# Altium PCB Asfaloth_L2_AVI_ver0.0.PcbDoc (part 2 of 2)
Units mil, origin at the board's own origin, x right, y up, seen from the top; angles counter-clockwise.
Board outline 4135 x 3937.01 mil, 2 copper layers (Top Layer, Bottom Layer); 80 components, 219 nets, 489 pads, 1059 vias.
Unrouted connection lines stored in the file: 5.
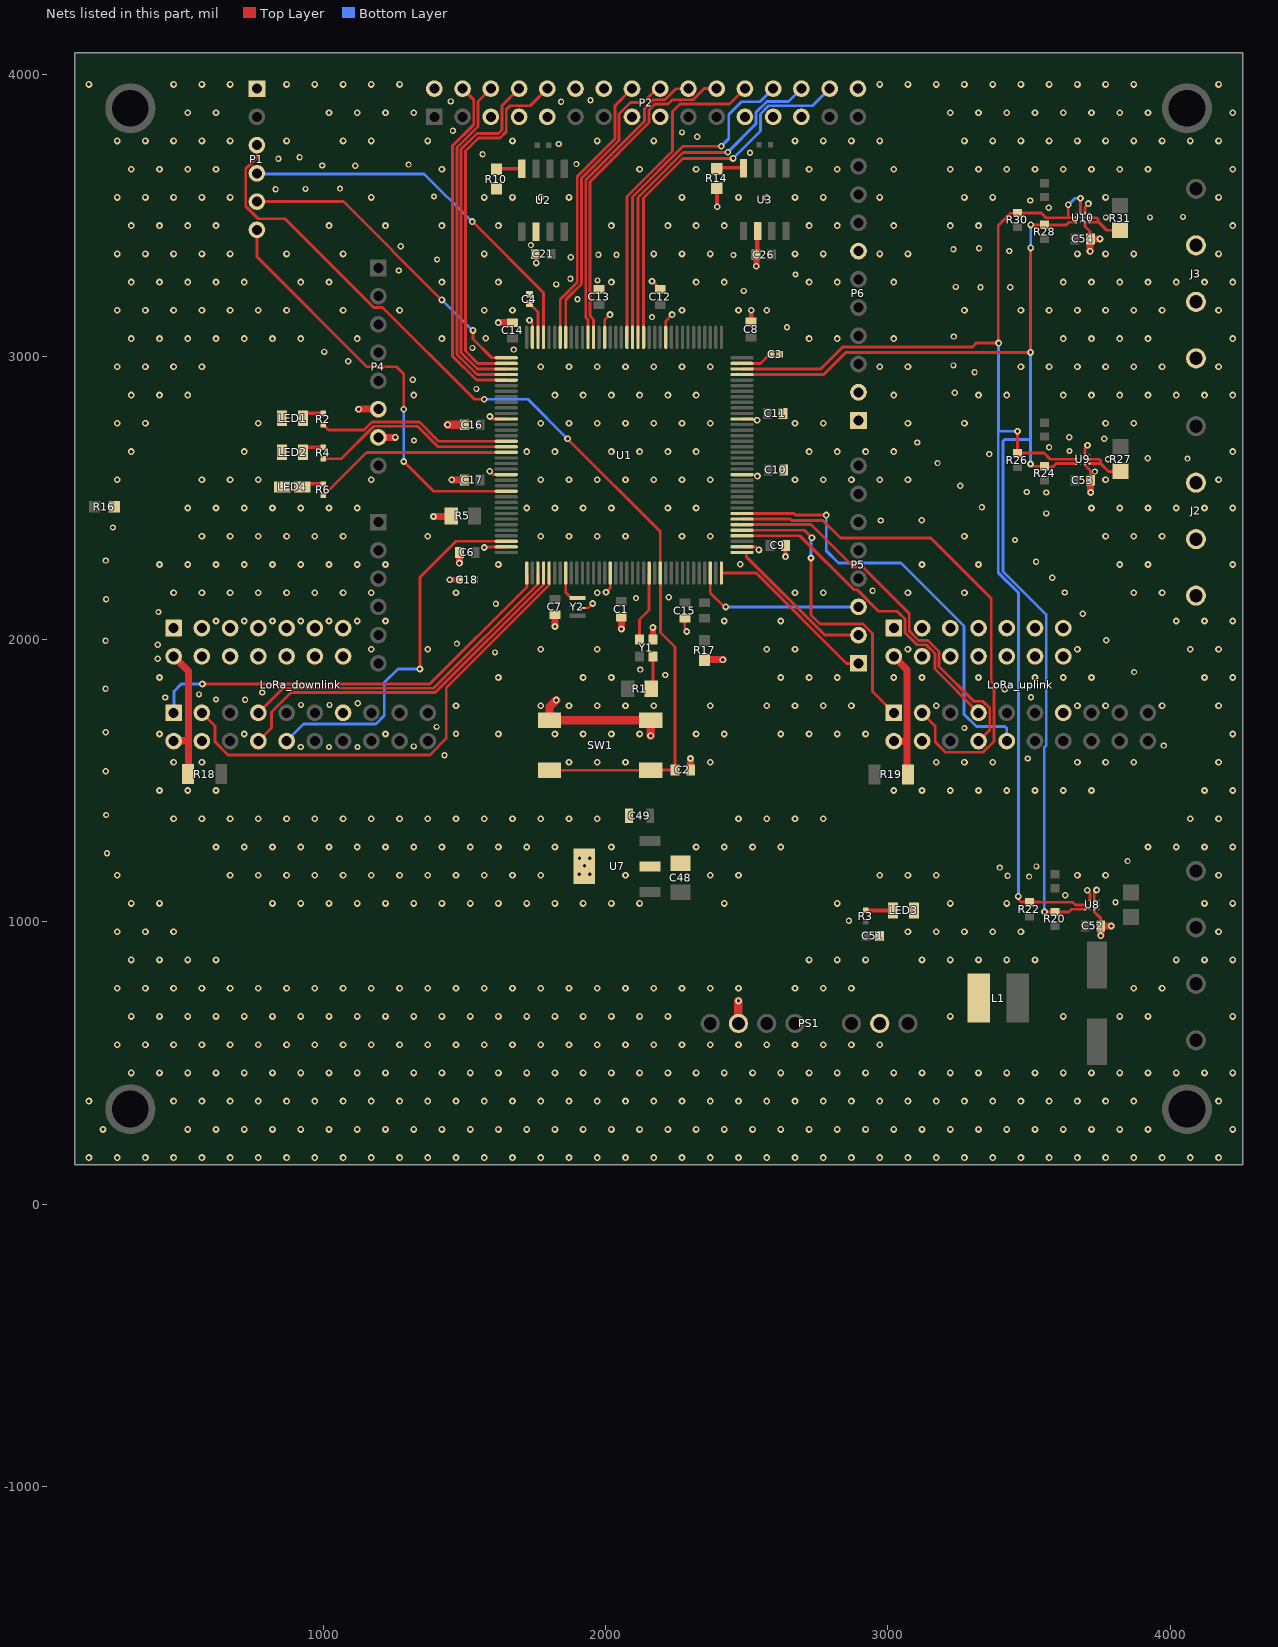
[diagram p2: the nets of this part, all layers, seen from the top]

## Via types
v1: diameter 24, hole 12, Top Layer to Bottom Layer, tented both sides, 893 vias
v2: diameter 22, hole 12, Top Layer to Bottom Layer, tented both sides, 166 vias

## Nets (pads, with @x,y where several pads share a name; then routed paths per layer and width w, separated by ;. In a path a pad name is that pad's centre, name@x,y a point inside that pad or via, vN(x,y) a via of type N, cw(c..) or ccw(c..) an arc to the next point about the centre after c; other vN are vias at no path point) (continued)
GND: C1.2 C2.2 C3.2 C4.2 C6.2 C7.2 C8.2 C9.2 C10.2 C11.2 C12.2 C13.2 C14.2 C15.2 C16.2 C17.2 C18.2 C21.2 C26.2 C48.1 C49.2 C52.2 C53.2 C54.2 LED1.1 LED2.1 LED3.1 LED4.1 LoRa_downlink.4 LoRa_downlink.24 LoRa_downlink.32 LoRa_uplink.4 LoRa_uplink.24 LoRa_uplink.32 P1.1 P2.2 P2.5 P2.7 P2.9 P2.12 P2.14 P2.15 P2.17 P2.23 P2.25 P2.27 P2.32 P4.6 P4.7 P6.1 P6.2 P6.7 PS1.7 R5.2 R10.1 R14.1 R16.2 R17.1 SW1.3 SW1.4 U1.16 U1.38 U1.51 U1.61 U1.83 U1.94 U1.107 U1.120 U1.130 U1.143 U2.2 U3.2 U7.2 U7.4 U8.B3 U8.C1 U8.C3 U9.C1 U9.C3 U10.C1 U10.C3 Y1.2 Y2.2 | length 2936
  Top Layer w8: Y2.2@1918.75,2111.03 1939.03,2111.03 v1(1955,2127)
  Top Layer w10: v1(1570.91,2325.2) 1573.23,2327.52 U1.143@1648.83,2327.52 ; v1(1590,2595) 1601.57,2583.43 U1.130@1648.83,2583.43 ; v1(1591,2789) 1592,2789 1600.72,2780.28 U1.120@1648.83,2780.28 ; v1(1731,3130) 1741.01,3119.99 1741.01,3069.99 U1.107@1741.35,3069.65 ; C13.2@1977.46,3240 C13.2@1977.57,3240.12 ; U1.94@1997.26,3069.65 1997.26,3131.26 v1(2016,3150) ; v1(2002,2167) 2016.94,2181.94 U1.16@2016.94,2235 ; v1(2165,3268) 2165.99,3268 2193.99,3240 C12.2@2194.11,3240.12 ; U1.83@2213.8,3069.65 2213.8,3127.8 v1(2236,3150) ; C15.2@2281,2074.44 2281,2038.64 2288,2031.64 v1(2288,2027.86) ; R17.1@2351.26,1926.74 R17.1@2352.52,1928 ; U1.38@2483.48,2327.52 2532.48,2327.52 v1(2543.32,2316.68) 2543.32,2316.47 2545.79,2314 v1@2546,2314 ; U1.51@2483.48,2583.43 2483.83,2583.08 2532.92,2583.08 v1(2538,2578) ; U1.61@2483.48,2780.28 2483.83,2779.93 2533.07,2779.93 v1(2537,2776) ; U9.C1@3697.75,2622.25 3697.75,2616.79 3707.34,2607.2 3707.84,2607.2 3717.43,2597.61 C53.2@3717.43,2565.85 ; U9.C3@3697.75,2653.75 3697.75,2677.75 v1(3707,2687) ; U10.C1@3697.75,3477.25 3697.75,3462.5 3716,3444.25 3716,3419.75 C54.2@3717.43,3418.32 ; U10.C3@3697.75,3508.75 3697.75,3530.14 3710,3542.39 v1(3710,3543) ; v1(3706,1111.39) 3715.25,1102.14 U8.B3@3715.25,1075.75 ; U8.C1@3731,1044.25 3731,1035 3753.56,1012.44 C52.2@3753.56,985.32 ; U8.C3@3731,1075.75 3731,1104.5 v1(3738.95,1112.45)
  Top Layer w15: C21.2@1751.72,3364.72 C21.2@1751.44,3365 C21.2@1752.72,3366.28 ; U2.2@1752.72,3442.5 U2.2@1754,3443.78 ; C7.2@1821,2087.44 C7.2@1821.5,2086.94 ; C1.2@2056,2078.88 C1.2@2056.19,2078.7 ; v1@2056.19,2036.81 v1(2056.37,2036.63) ; C12.2@2194.11,3240.12 C12.2@2194.11,3240.12 ; R14.1@2394,3597.48 2395,3596.48 2395,3533 v1(2396,3532) ; C8.2@2516,3125.12 v1(2516,3165) ; C26.2@2533.44,3362 C26.2@2534.72,3360.72 ; C26.2@2537.72,3362 U3.2@2537.72,3445.78 ; v1(2543.32,2316.68) v1@2546,2314 ; v1(2637.44,2293) C9.2@2637.44,2332.88 ; LED3.1@3098.4,1040 LED3.1@3098.5,1039.9
  Top Layer w16: R17.1@2351,1926.48 R17.1@2351.26,1926.74
  Top Layer w20: v1(1449,2211) C18.2@1483.42,2210.99 ; R10.1@1614,3595.48 R10.1@1615,3594.48 ; v1(2168,2042) 2168,2039 2168.24,2038.76 Y1.2@2168.24,1999.06 ; v1(2534,3321) 2534.72,3321.72 C26.2@2534.72,3360.72 ; C52.2@3753.56,985.32 C52.2@3754,984.87
  Top Layer w25: v1(1126,2815) P4.6@1196,2815 ; P4.7@1196,2715 v1(1256,2715) ; v1(1391,2435) 1451.63,2435 R5.2@1453.63,2437 ; v1(1456,2565) C17.2@1500.88,2565 ; v1(1483,2270) 1483.44,2270.44 C6.2@1483.44,2307.83 C6.2@1483.87,2307.19 ; v1(1620.56,3121.56) C14.2@1671,3121.56 ; v1(1821.5,2045.5) C7.2@1821.5,2086.94 ; v1@2056.19,2036.81 C1.2@2056.19,2078.7 ; v1(2301,1578) 2301,1535.06 C2.2@2301.56,1534.5 ; C2.2@2301.56,1538 C2.2@2301.56,1534.5 ; R17.1@2352.52,1928 v1(2416,1928) ; LoRa_uplink.24@3121,1930 3126,1935 LoRa_uplink.24@3121,1940 ; v1(3716,3374) 3716,3416.57 3717.43,3418 v1(3751,3418) ; C53.2@3717.43,2563.32 3718,2562.75 v1(3718,2520) ; C52.2@3753.56,985.32 3756.14,985.32 3756.41,985.04 v1(3791,985) v1(3791,985) ; v1(3754,951) C52.2@3754,984.87 ; C2.2@2301.56,1534.5 2302,1534.06 2301.56,1534.06 C2.2@2301.56,1534.5
  Top Layer w30: v1(1441,2760) C16.2@1500.88,2760 ; v1(1826,1785) 1801.87,1760.87 SW1.4@1801.87,1713.19 SW1.3@2160.13,1713.19 2160.13,1659.13 v1(2160,1659) ; C48.1@2254.7,1196.06 C48.1@2266,1207.36 ; v1(2471,720) PS1.7@2471,640 PS1.7@2472.93,641.93
  other v1: 171,165 271,165 371,165 471,165 571,165 671,165 771,165 871,165 971,165 1071,165 1171,165 1271,165 1371,165 1471,165 1571,165 1671,165 1771,165 1871,165 1971,165 2071,165 2171,165 2271,165 2371,165 2471,165 2571,165 2671,165 2771,165 2871,165 2971,165 3071,165 3171,165 3271,165 3371,165 3471,165 3571,165 3671,165 3771,165 3871,165 3971,165 4071,165 4171,165 221,265 521,265 621,265 721,265 821,265 921,265 1021,265 1121,265 1221,265 1321,265 1421,265 1521,265 1621,265 1721,265 1821,265 1921,265 2021,265 2121,265 2221,265 2321,265 2421,265 2521,265 2621,265 2721,265 2821,265 2921,265 3021,265 3121,265 3221,265 3321,265 3421,265 3521,265 3621,265 3721,265 3821,265 3921,265 4221,265 171,365 471,365 571,365 671,365 771,365 871,365 971,365 1071,365 1171,365 1271,365 1371,365 1471,365 1571,365 1671,365 1771,365 1871,365 1971,365 2071,365 2171,365 2271,365 2371,365 2471,365 2571,365 2671,365 2771,365 2871,365 2971,365 3071,365 3171,365 3271,365 3371,365 3471,365 3571,365 3671,365 3771,365 3871,365 4171,365 321,465 421,465 521,465 621,465 721,465 821,465 921,465 1021,465 1121,465 1221,465 1321,465 1421,465 1521,465 1621,465 1721,465 1821,465 1921,465 2021,465 2121,465 2221,465 2321,465 2421,465 2521,465 2621,465 2721,465 2821,465 2921,465 3021,465 3121,465 3221,465 3321,465 3421,465 3521,465 3621,465 3721,465 3821,465 3921,465 4021,465 4121,465 4221,465 271,565 371,565 471,565 571,565 671,565 771,565 871,565 971,565 1071,565 1171,565 1271,565 1371,565 1471,565 1571,565 1671,565 1771,565 1871,565 1971,565 2071,565 2171,565 2271,565 2371,565 2471,565 2571,565 2671,565 2771,565 2871,565 2971,565 321,665 421,665 521,665 621,665 721,665 821,665 921,665 1021,665 1121,665 1221,665 1321,665 1421,665 1521,665 1621,665 1721,665 1821,665 1921,665 2021,665 2121,665 2221,665 3221,665 3621,665 3821,665 3921,665 4221,665 271,765 371,765 471,765 571,765 671,765 771,765 871,765 971,765 1071,765 1171,765 1271,765 1371,765 1471,765 1571,765 1671,765 1771,765 1871,765 1971,765 2071,765 2171,765 2271,765 2371,765 2471,765 2671,765 2771,765 2871,765 3871,765 3971,765 321,865 421,865 521,865 621,865 2721,865 2821,865 2921,865 3121,865 3221,865 3321,865 3421,865 3521,865 4021,865 4121,865 4221,865 271,965 371,965 471,965 3071,965 3171,965 3271,965 3371,965 3471,965 4171,965 321,1065 421,1065 821,1065 921,1065 1021,1065 1121,1065 1221,1065 1321,1065 1421,1065 1521,1065 1621,1065 1721,1065 1821,1065 1921,1065 2021,1065 2121,1065 2421,1065 2821,1065 3221,1065 3421,1065 4121,1065 4221,1065 271,1165 671,1165 771,1165 871,1165 971,1165 1071,1165 1171,1165 1271,1165 1371,1165 1471,1165 1571,1165 1671,1165 1771,1165 2071,1165 2371,1165 2471,1165 2971,1165 3071,1165 3171,1165 3671,1165 3771,1165 4171,1165 621,1265 721,1265 821,1265 921,1265 1021,1265 1121,1265 1221,1265 1321,1265 1421,1265 1521,1265 1621,1265 1721,1265 1821,1265 2021,1265 2321,1265 2421,1265 2521,1265 2621,1265 3921,1265 4021,1265 4121,1265 4221,1265 471,1365 571,1365 671,1365 771,1365 871,1365 971,1365 1071,1365 1171,1365 1271,1365 1371,1365 1471,1365 1571,1365 1671,1365 1771,1365 1871,1365 1971,1365 2471,1365 2571,1365 2671,1365 2771,1365 4071,1365 4171,1365 421,1465 521,1465 621,1465 3021,1465 3121,1465 3221,1465 3321,1465 3421,1465 3521,1465 3621,1465 3721,1465 4121,1465 4221,1465 471,1565 571,1565 1871,1565 1971,1565 2071,1565 2371,1565 3171,1565 3271,1565 3371,1565 3671,1565 3771,1565 3871,1565 4171,1565 421,1665 721,1665 1221,1665 1621,1665 1821,1665 1921,1665 2021,1665 2121,1665 2321,1665 2421,1665 2621,1665 2721,1665 2821,1665 2921,1665 4221,1665 1471,1765 1771,1765 1871,1765 1971,1765 2071,1765 2171,1765 2371,1765 2571,1765 2671,1765 2771,1765 2871,1765 3171,1765 3671,1765 3771,1765 3971,1765 4171,1765 421,1865 1621,1865 1921,1865 2021,1865 2621,1865 2721,1865 2821,1865 3021,1865 3121,1865 3321,1865 3521,1865 3621,1865 3721,1865 4121,1865 4221,1865 1171,1965 1371,1965 1771,1965 1971,1965 2571,1965 2671,1965 3071,1965 3671,1965 4071,1965 4171,1965 621,2065 721,2065 821,2065 921,2065 1021,2065 1121,2065 1221,2065 2421,2065 2621,2065 4021,2065 4121,2065 4221,2065 471,2165 571,2165 671,2165 771,2165 871,2165 971,2165 1071,2165 1171,2165 1471,2165 1971,2165 2671,2165 2771,2165 3071,2165 3271,2165 3871,2165 3971,2165 421,2265 521,2265 621,2265 721,2265 821,2265 921,2265 1021,2265 1121,2265 1221,2265 1621,2265 3121,2265 3321,2265 3821,2265 3921,2265 4221,2265 571,2365 671,2365 771,2365 871,2365 971,2365 1071,2365 1371,2365 1771,2365 1871,2365 1971,2365 2071,2365 2271,2365 2371,2365 3271,2365 3771,2365 3871,2365 3971,2365 521,2465 621,2465 721,2465 821,2465 921,2465 1021,2465 1121,2465 1721,2465 1821,2465 1921,2465 2021,2465 2221,2465 2321,2465 3721,2465 3821,2465 3921,2465 4021,2465 4121,2465 4221,2465 271,2565 571,2565 671,2565 771,2565 1171,2565 1771,2565 1871,2565 1971,2565 2071,2565 2171,2565 2271,2565 2371,2565 2671,2565 2771,2565 2871,2565 2971,2565 3071,2565 3771,2565 4171,2565 321,2665 721,2665 1721,2665 1821,2665 2021,2665 2121,2665 2221,2665 2321,2665 2721,2665 2821,2665 2921,2665 3021,2665 4221,2665 271,2765 371,2765 771,2765 1771,2765 1871,2765 1971,2765 2071,2765 2171,2765 2271,2765 2371,2765 2671,2765 2771,2765 3071,2765 3271,2765 3771,2765 3871,2765 321,2865 421,2865 521,2865 1321,2865 1821,2865 1921,2865 2021,2865 2121,2865 2221,2865 2321,2865 3021,2865 3321,2865 3421,2865 3621,2865 3721,2865 3821,2865 3921,2865 4021,2865 4121,2865 4221,2865 271,2965 371,2965 471,2965 571,2965 1771,2965 1871,2965 1971,2965 2071,2965 2171,2965 2271,2965 2371,2965 2971,2965 3071,2965 3471,2965 3571,2965 3671,2965 3771,2965 3871,2965 3971,2965 4171,2965 321,3065 421,3065 521,3065 621,3065 721,3065 821,3065 921,3065 1121,3065 1421,3065 2721,3065 2821,3065 3021,3065 3621,3065 3721,3065 3821,3065 3921,3065 4221,3065 271,3165 371,3165 471,3165 571,3165 671,3165 771,3165 871,3165 1071,3165 1271,3165 1571,3165 1671,3165 2271,3165 2471,3165 2571,3165 3271,3165 3471,3165 3571,3165 3671,3165 3771,3165 3871,3165 3971,3165 4171,3165 321,3265 421,3265 521,3265 621,3265 721,3265 921,3265 1021,3265 1421,3265 1621,3265 2021,3265 2321,3265 2421,3265 2721,3265 2821,3265 3021,3265 3621,3265 3721,3265 3821,3265 3921,3265 4021,3265 4121,3265 4221,3265 1755,3333 271,3365 371,3365 471,3365 571,3365 671,3365 871,3365 1071,3365 1571,3365 2171,3365 2271,3365 2371,3365 2671,3365 2771,3365 2971,3365 3071,3365 3671,3365 3771,3365 3871,3365 4171,3365 321,3465 421,3465 521,3465 621,3465 1021,3465 1221,3465 1421,3465 1621,3465 2021,3465 2221,3465 2321,3465 2421,3465 2721,3465 2821,3465 3021,3465 3221,3465 3321,3465 4221,3465 271,3565 371,3565 471,3565 571,3565 671,3565 1171,3565 1571,3565 1671,3565 1771,3565 1871,3565 2271,3565 2471,3565 2571,3565 2671,3565 2771,3565 2971,3565 3271,3565 3371,3565 3771,3565 4171,3565 321,3665 421,3665 521,3665 621,3665 1421,3665 2121,3665 2321,3665 2721,3665 2821,3665 3021,3665 3221,3665 3321,3665 3421,3665 3521,3665 3621,3665 3721,3665 3821,3665 3921,3665 4221,3665 271,3765 371,3765 471,3765 571,3765 671,3765 871,3765 1071,3765 1171,3765 1371,3765 1671,3765 1971,3765 2171,3765 2671,3765 2771,3765 2871,3765 2971,3765 3271,3765 3371,3765 3471,3765 3571,3765 3671,3765 3771,3765 3871,3765 3971,3765 4071,3765 4171,3765 521,3865 621,3865 1021,3865 1121,3865 1221,3865 1321,3865 3221,3865 3321,3865 3421,3865 3521,3865 3621,3865 3721,3865 3821,3865 3921,3865 4221,3865 171,3965 471,3965 571,3965 671,3965 871,3965 971,3965 1071,3965 1171,3965 1271,3965 2971,3965 3071,3965 3171,3965 3271,3965 3371,3965 3471,3965 3571,3965 3671,3965 3771,3965 3871,3965 4171,3965
  other v2: 2862,1004 3806,1069 3628,1094 3500,1160 3424,1163 1907,1168 1944,1168 3396,1192 3526,1196 1926,1199 3849,1215 1908,1225 1945,1225 235,1243 232,1378 231,1533 3495,1578 1430,1590 921,1619 1021,1619 1122,1619 1321,1621 3977,1624 1471,1666 231,1671 3271,1686 1402,1690 922,1768 1023,1768 1123,1774 724,1786 621,1787 441,1794 3507,1795 561,1805 785,1812 3414,1823 230,1825 2212,1874 3872,1884 2123,1893 415,1931 1609,1954 415,1981 1474,1985 230,1995 3773,1997 3690,2091 417,2097 1612,2126 232,2142 2108,2146 2224,2149 3626,2166 2946,2172 3582,2218 2477,2266 3525,2275 231,2279 3450,2352 256,2396 2975,2421 3120,2422 3561,2446 3333,2468 3561,2520 3492,2522 3256,2544 3733,2594 3176,2624 3779,2638 4061,2640 3920,2641 3359,2656 3643,2667 3571,2680 3104,2697 1322,2704 3766,2710 3642,2716 3237,2873 1543,2887 1318,2919 3307,2946 3232,2970 1089,2985 1004,3018 1675,3026 1529,3032 1576,3066 3233,3072 2643,3105 2165,3141 1901,3204 2490,3234 3328,3247 3433,3247 3240,3248 1826,3257 1972,3271 1876,3277 2673,3292 1268,3306 1404,3345 1877,3353 2453,3361 1975,3362 2039,3362 3430,3375 3232,3381 3323,3385 1275,3392 1736,3396 3772,3494 3928,3494 4045,3496 3570,3528 3504,3554 1393,3568 832,3594 938,3595 1060,3596 1114,3677 997,3678 1303,3681 1897,3683 842,3702 917,3707 1565,3718 2512,3723 1835,3754 2325,3780 2271,3795 1460,3801 1843,3904 1452,3905 1947,3909
IN-_PM2: J2.3 R27.2 U9.D1 U9.D2 | length 175.3
  Top Layer w10: U9.D1@3713.5,2622.25 3753.75,2622.25 3754,2622 ; U9.D2@3713.5,2638 3748.14,2638 3754,2632.14 3754,2622 ; R27.2@3824,2594.69 3823.65,2594.35 3781.65,2594.35 3754,2622
IN-_PM3: J3.3 R31.2 U10.D1 U10.D2 | length 164.7
  Top Layer w10: U10.D1@3713.5,3477.25 3746.46,3477.25 ; U10.D2@3713.5,3493 3739,3493 3744.86,3487.14 3744.86,3478.86 3775.02,3448.69 R31.2@3822,3448.69
MISO_SD: P2.6 U1.112 | length 1195.3
  Top Layer w10: P2.6@1594,3950 1548.53,3904.53 1548.53,3815.95 1474,3741.43 1474,3008.57 1544.82,2937.76 U1.112@1648.83,2937.76
MISO_sx_U_LoRa_downlink: 
MISO_sx_U_LoRa_uplink: 
MISO_U_LoRa_downlink: LoRa_downlink.8 U1.4 | length 1312.2
  Top Layer w10: LoRa_downlink.8@771,1640 817.51,1686.51 817.51,1742.41 887.1,1812 1397.49,1812 1780.38,2194.88 1780.38,2234.65 U1.4@1780.72,2235
MISO_U_LoRa_uplink: LoRa_uplink.8 U1.42 | length 1346.3
  Top Layer w10: U1.42@2483.48,2406.26 2727.63,2406.26 2878.2,2255.69 2911.21,2255.69 3075.53,2091.37 3075.53,2029.57 3109.02,1996.08 3142.03,1996.08 3181.47,1956.64 3181.47,1903.53 3304,1781 3335.9,1781 3360.53,1756.37 3360.53,1679.53 LoRa_uplink.8@3321,1640
MOSI_SD: P2.4 U1.113 | length 1219.6
  Top Layer w10: P2.4@1494,3950 1533.53,3910.47 1533.53,3822.17 1459,3747.64 1459,3002.36 1543.29,2918.07 U1.113@1648.83,2918.07
MOSI_sx_U_LoRa_downlink: 
MOSI_sx_U_LoRa_uplink: 
MOSI_U_LoRa_downlink: LoRa_downlink.3 U1.5 | length 1720.7
  Top Layer w10: LoRa_downlink.3@571,1740 617.51,1693.49 617.51,1637.59 664.1,1591 1378.47,1591 1436,1648.53 1436,1828 1800.06,2192.06 1800.06,2234.65 U1.5@1800.41,2235
MOSI_U_LoRa_uplink: LoRa_uplink.3 U1.43 | length 1870.1
  Top Layer w10: U1.43@2483.48,2425.94 2655.26,2425.94 2659.89,2421.32 2769.57,2421.32 2831.89,2359 3152,2359 3366,2145 3366,1850.9 3375.53,1841.37 3375.53,1638.63 3337.37,1600.47 3204.63,1600.47 3167.51,1637.59 3167.51,1693.49 LoRa_uplink.3@3121,1740
Motor_GND: J3.1 J3.2
NetANT_HF_U_LoRa_downlink_1: 
NetANT_HF_U_LoRa_uplink_1: 
NetANT_LF_U_LoRa_downlink_1: 
NetANT_LF_U_LoRa_uplink_1: 
NetC1_U_LoRa_downlink_2: 
NetC1_U_LoRa_uplink_2: 
NetC2_U_LoRa_downlink_2: 
NetC2_U_LoRa_uplink_2: 
NetC3_1: C3.1 U1.71 | length 117.3
  Top Layer w10: U1.71@2483.48,2977.13 2483.83,2976.78 2548.59,2976.78 2583.59,3011.78 C3.1@2585.37,3010
NetC4_1: C4.1 U1.106 | length 137.5
  Top Layer w10: C4.1@1731,3194.68 C4.1@1731,3189.68 1731,3189.25 1761,3159.25 1761,3154.68 ; U1.106@1761.02,3069.67 1761.02,3154.66
NetC4_U_LoRa_downlink_2: 
NetC4_U_LoRa_uplink_2: 
NetC5_U_LoRa_downlink_2: 
NetC5_U_LoRa_uplink_2: 
NetC7_U_LoRa_downlink_2: 
NetC7_U_LoRa_uplink_2: 
NetC9_U_LoRa_downlink_1: 
NetC9_U_LoRa_downlink_2: 
NetC9_U_LoRa_uplink_1: 
NetC9_U_LoRa_uplink_2: 
NetC11_U_LoRa_downlink_2: 
NetC11_U_LoRa_uplink_2: 
NetC12_U_LoRa_downlink_1: 
NetC12_U_LoRa_uplink_1: 
NetC14_U_LoRa_downlink_1: 
NetC14_U_LoRa_uplink_1: 
NetC16_U_LoRa_downlink_2: 
NetC16_U_LoRa_uplink_2: 
NetC17_U_LoRa_downlink_2: 
NetC17_U_LoRa_uplink_2: 
NetC18_U_LoRa_downlink_1: 
NetC18_U_LoRa_uplink_1: 
NetC19_U_LoRa_downlink_1: 
NetC19_U_LoRa_downlink_2: 
NetC19_U_LoRa_uplink_1: 
NetC19_U_LoRa_uplink_2: 
NetC20_U_LoRa_downlink_1: 
NetC20_U_LoRa_downlink_2: 
NetC20_U_LoRa_uplink_1: 
NetC20_U_LoRa_uplink_2: 
NetC22_U_LoRa_downlink_1: 
NetC22_U_LoRa_uplink_1: 
NetC28_U_LoRa_downlink_1: 
NetC28_U_LoRa_downlink_2: 
NetC28_U_LoRa_uplink_1: 
NetC28_U_LoRa_uplink_2: 
NetC30_U_LoRa_downlink_2: 
NetC30_U_LoRa_uplink_2: 
NetC31_U_LoRa_downlink_1: 
NetC31_U_LoRa_uplink_1: 
NetC33_U_LoRa_downlink_1: 
NetC33_U_LoRa_uplink_1: 
NetC36_U_LoRa_downlink_1: 
NetC36_U_LoRa_downlink_2: 
NetC36_U_LoRa_uplink_1: 
NetC36_U_LoRa_uplink_2: 
NetC38_U_LoRa_downlink_1: 
NetC38_U_LoRa_downlink_2: 
NetC38_U_LoRa_uplink_1: 
NetC38_U_LoRa_uplink_2: 
NetC39_U_LoRa_downlink_1: 
NetC39_U_LoRa_downlink_2: 
NetC39_U_LoRa_uplink_1: 
NetC39_U_LoRa_uplink_2: 
NetC42_U_LoRa_downlink_1: 
NetC42_U_LoRa_uplink_1: 
NetL3_U_LoRa_downlink_2: 
NetL3_U_LoRa_uplink_2: 
NetL12_U_LoRa_downlink_1: 
NetL12_U_LoRa_uplink_1: 
NetLED1_2: LED1.2 R2.2 | length 83.5
  Top Layer w12: LED1.2@939.09,2800.18 R2.2@1001,2800.18
  Top Layer w16: LED1.2@929.38,2782.65 929.38,2790.46 LED1.2@939.09,2800.18
NetLED2_2: LED2.2 R4.2 | length 83.5
  Top Layer w12: LED2.2@939.09,2680.18 R4.2@1001,2680.18
  Top Layer w16: LED2.2@929.38,2662.65 929.38,2670.46 LED2.2@939.09,2680.18
NetLED3_2: LED3.2 R3.2 | length 95.1
  Top Layer w15: R3.2@2926,1040.36 2926.18,1040.18 3020.82,1040.18 LED3.2@3021,1040
NetLED4_2: LED4.2 R6.2 | length 79.8
  Top Layer w12: LED4.2@926.43,2540 937.82,2551.38 999.79,2551.38 R6.2@1001,2550.18
NetR1_1: R1.1 Y1.1 | length 117.4
  Top Layer w10: R1.1@2168.24,1830.87 Y1.1@2168.24,1940
  Top Layer w15: R1.1@2162.37,1825 R1.1@2168.24,1830.87
NetR6_U_LoRa_downlink_1: 
NetR6_U_LoRa_uplink_1: 
NetR7_U_LoRa_downlink_1: 
NetR7_U_LoRa_uplink_1: 
NetR10_2: R10.2 U2.8 | length 90.7
  Top Layer w8: R10.2@1614,3664.52 R10.2@1615.7,3666.22
  Top Layer w12: R10.2@1615.7,3666.22 U2.8@1704,3666.22
NetR10_U_LoRa_downlink_2: 
NetR10_U_LoRa_uplink_2: 
NetR14_2: R14.2 U3.8 | length 96.2
  Top Layer w10: R14.2@2394,3666.52 R14.2@2396.92,3669.44
  Top Layer w12: R14.2@2396.92,3669.44 U3.8@2489,3669.44
NetU1_8: U1.8 Y2.3 | length 118.3
  Top Layer w10: U1.8@1859.46,2235 1859.46,2166.54 1876.63,2149.37 1898.13,2149.37 Y2.3@1901,2146.5
NetU1_23: U1.23 Y1.3 | length 249.9
  Top Layer w10: Y1.3@2121,1999.06 2121,2070 2154.74,2103.74 U1.23@2154.74,2235
NRESET_sx_U_LoRa_downlink: 
NRESET_sx_U_LoRa_uplink: 
NRESET_U_LoRa_downlink: LoRa_downlink.10 U1.142 | length 1329.6
  Top Layer w10: v1(1343,1895) 1343,2220 1470.2,2347.2 U1.142@1648.83,2347.2
  Bottom Layer w10: LoRa_downlink.10@871,1640 931.47,1700.47 1187.37,1700.47 1216.47,1729.57 1216.47,1762.59 1217,1763.11 1217,1847 1265,1895 v1(1343,1895)
NRESET_U_LoRa_uplink: LoRa_uplink.10 U1.44 | length 1554.2
  Top Layer w10: U1.44@2483.48,2445.63 2483.83,2445.28 2667.03,2445.28 2672.31,2440 v1(2782,2440)
  Bottom Layer w10: v1(2782,2440) 2782,2314 2825.5,2270.5 3046.4,2270.5 3237.37,2079.53 3270,2046.9 3270,1735 3314,1691 3415.14,1691 3421,1685.14 LoRa_uplink.10@3421,1640
NRST_STM: C2.1 P1.3 SW1.1 SW1.2 U1.25 | length 3488.4
  Top Layer w10: P1.3@766,3750 765.57,3749.57 765.57,3705.47 726.47,3666.37 726.47,3533.63 770.57,3489.53 865.57,3489.53 1179.63,3175.47 1210.53,3175.47 1536,2850 v1(1571,2850) ; SW1.2@1801.87,1536.81 1802.26,1536.42 SW1.1@2160.13,1536.42 2161.72,1538 C2.1@2246.44,1538 2246.44,1972.56 2194.46,2024.54 2194.46,2234.65 U1.25@2194.11,2235 2194.11,2381.89 v1(1866,2710)
  Bottom Layer w10: v1(1571,2850) 1726,2850 v1(1866,2710)
NSS_SD: P2.10 U1.110 | length 1299
  Top Layer w10: U1.110@1648.83,2977.13 1547.87,2977.13 1504,3021 1504,3729 1550,3775 1626.21,3775 1648.53,3797.31 1648.53,3876.53 1661.53,3889.53 1733.53,3889.53 P2.10@1794,3950
NSS_sx_U_LoRa_downlink: 
NSS_sx_U_LoRa_uplink: 
NSS_U_LoRa_downlink: LoRa_downlink.7 U1.3 | length 1217.5
  Top Layer w10: LoRa_downlink.7@771,1740 858,1827 1391.28,1827 1760.69,2196.41 1760.69,2234.65 U1.3@1761.04,2235
NSS_U_LoRa_uplink: LoRa_uplink.7 U1.40 | length 1158.4
  Top Layer w10: U1.40@2483.48,2366.89 2688.21,2366.89 2879.63,2175.47 2891.43,2175.47 2967.6,2099.3 3033.17,2099.3 3060.53,2071.94 3060.53,2023.36 3102.81,1981.08 3135.82,1981.08 3166.47,1950.43 3166.47,1894.53 LoRa_uplink.7@3321,1740
PA_GND: J2.1 J2.2
PG9: R2.1 U1.124 | length 695.3
  Top Layer w10: R2.1@1001,2759.82 1001.49,2759.82 1019.98,2741.33 1145.21,2741.33 1173.41,2769.53 1341.14,2769.53 1409.13,2701.54 U1.124@1648.83,2701.54
PG10: R4.1 U1.125 | length 725.5
  Top Layer w10: R4.1@1001,2639.82 1064.92,2639.82 1179.63,2754.53 1334.92,2754.53 1407.6,2681.85 U1.125@1648.83,2681.85
PG11: R6.1 U1.126 | length 710.9
  Top Layer w10: R6.1@1001,2509.82 1001.49,2509.82 1153.84,2662.17 U1.126@1648.83,2662.17
RTS_IMU: P5.3 U1.34 | length 615.6
  Top Layer w10: U1.34@2371.28,2235 2371.28,2164.72 2421,2115 v1(2426,2115)
  Bottom Layer w10: v1(2426,2115) P5.3@2896,2115
RX_IMU: P5.2 U1.37 | length 542.1
  Top Layer w10: U1.37@2483.48,2307.83 2497.69,2307.83 2498.53,2307 2498.53,2292.79 2776.31,2015 P5.2@2896,2015
RXTX_RF_sx_U_LoRa_downlink: 
RXTX_RF_sx_U_LoRa_uplink: 
RXTX_U_LoRa_downlink: LoRa_downlink.13
RXTX_U_LoRa_uplink: LoRa_uplink.13
SCK_SD: P2.8 U1.111 | length 1248.4
  Top Layer w10: U1.111@1648.83,2957.44 1546.35,2957.44 1489,3014.79 1489,3735.21 1544.79,3791 1621,3791 1633.53,3803.53 1633.53,3889.53 P2.8@1694,3950
SCK_sx_U_LoRa_downlink: 
SCK_sx_U_LoRa_uplink: 
SCK_U_LoRa_downlink: LoRa_downlink.1 U1.1 | length 1529.5
  Top Layer w10: LoRa_downlink.1@471,1740 LoRa_downlink.1@472,1741 ; v1(573,1842) 1378,1842 1721.67,2185.67 U1.1@1721.67,2235
  Bottom Layer w10: LoRa_downlink.1@472,1740 472,1816 498,1842 v1(573,1842)
SCK_U_LoRa_uplink: LoRa_uplink.1 U1.41 | length 1090.7
  Top Layer w10: U1.41@2483.48,2386.57 2704.43,2386.57 v1(2731,2360) ; v1(2728,2288) 2728,2086 2759.47,2054.53 2912.37,2054.53 2946,2020.9 2946,1815 2996.47,1764.53 LoRa_uplink.1@3021,1740
  Bottom Layer w10: v1(2728,2288) 2728,2357 v1(2731,2360)
SCL_STM: R20.2 R24.2 R28.2 U1.69 U8.A1 U9.A1 U10.A1 | length 4215.9
  Top Layer w10: U1.69@2483.48,2937.76 2772.76,2937.76 2851,3016 v1(3505,3016) 3505,3385 v1(3506,3386) ; v1(3505,2621) 3505,2620 3512.32,2612.68 R24.2@3555,2612.68 3556.68,2611 3583.64,2611 3595.64,2623 3665.5,2623 U9.A1@3666.25,2622.25 ; v1(3506.32,3467.68) 3631.68,3467.68 3641,3477 3666,3477 U10.A1@3666.25,3477.25 ; v1@3555.05,1035.14 3590.86,1035.14 3591,1035 3641.45,1035 3650.7,1044.25 U8.A1@3699.5,1044.25
  Bottom Layer w10: v1(3505,2621) 3505,2708 ; v1(3505,3016) 3505,2708 ; v1(3506,3386) 3506,3467.37 v1(3506.32,3467.68) ; v1@3554,1036.18 3554,1617.1 3560.53,1623.63 3560.53,2087.69 3408,2240.21 3408,2702.14 3413.86,2708 3505,2708
  other v1: 3554.59,1035.59
SCL_U_LoRa_downlink: LoRa_downlink.23
SCL_U_LoRa_uplink: LoRa_uplink.23
SDA_STM: R22.2 R26.2 R30.2 U1.70 U8.A2 U9.A2 U10.A2 U10.B3 | length 4421.8
  Top Layer w10: U1.70@2483.48,2957.44 2762.23,2957.44 2840.26,3035.47 3299.47,3035.47 3313,3049 v1(3392,3049) ; v1@3391,3049 3391,3466 3433.87,3508.87 3458.19,3508.87 R30.2@3459,3509.68 3543.32,3509.68 3560,3493 3639,3493 ; v1(3459,2737) 3458,2736 3458,2728 3459,2727 R26.2@3459,2659.68 3553.32,2659.68 3575,2638 U9.A2@3666.25,2638 ; v1(3462,1090) 3462,1079 3471.32,1069.68 R22.2@3501,1069.68 3501.18,1069.5 3537.21,1069.5 ; 3537.21,1069.32 3654.68,1069.32 3657.61,1066.39 3664,1060 U8.A2@3699.5,1060 ; v1(3639,3539) 3639,3493 ; U10.A2@3666.25,3493 3639,3493 ; U10.B3@3682,3508.75 v1(3682,3562)
  Bottom Layer w10: v1(3392,3049) 3392,2738 3393,2737 ; v1(3459,2737) 3393,2737 ; v1(3462,1090) 3462,2165 3391,2236 3391,2735 3393,2737 ; v1(3639,3539) 3662,3562 v1(3682,3562)
SDA_U_LoRa_downlink: LoRa_downlink.21
SDA_U_LoRa_uplink: LoRa_uplink.21
Spare_DIO0: P2.30 U1.87 | length 1348.3
  Top Layer w10: U1.87@2135.06,3069.65 2135.06,3563.06 2275,3703 v1(2452,3703)
  Bottom Layer w10: v1(2452,3703) 2548.53,3799.53 2548.53,3860.43 2577.63,3889.53 2733.53,3889.53 P2.30@2794,3950
Spare_DIO1: P2.28 U1.88 | length 1257.3
  Top Layer w10: U1.88@2115.37,3069.65 2115.37,3564.58 2274.79,3724 2431.99,3724 v1(2432.99,3725)
  Bottom Layer w10: v1(2432.99,3725) 2533.53,3825.54 2533.53,3866.64 2571.41,3904.53 2648.53,3904.53 P2.28@2694,3950
Spare_DIO2: P2.26 U1.89 | length 1204.4
  Top Layer w10: U1.89@2095.69,3069.65 2095.69,3566.47 2275.21,3746 v1(2410,3746)
  Bottom Layer w10: v1(2410,3746) 2436.59,3772.59 2436.59,3858.59 2481.49,3903.49 2547.49,3903.49 P2.26@2594,3950
Spare_DIO3: P2.24 U1.90 | length 1156.6
  Top Layer w10: U1.90@2076,3069.65 2076,3568 2237,3729 2237,3869 2263.47,3895.47 2439.47,3895.47 P2.24@2494,3950
Spare_RX: P2.20 U1.97 | length 1084.3
  Top Layer w10: U1.97@1938.2,3069.65 1938.2,3131.58 1930,3139.79 1930,3626.57 2138,3834.57 2138,3879 2169.47,3910.47 2210.37,3910.47 2249.47,3949.57 2293.57,3949.57 P2.20@2294,3950
Spare_TX: P2.22 U1.96 | length 1167.6
  Top Layer w10: U1.96@1957.89,3069.65 1957.89,3133.11 1945,3146 1945,3620.36 2154.47,3829.83 2154.47,3874.26 2175.69,3895.47 2222.02,3895.47 2237.02,3910.47 2310.37,3910.47 2349.9,3950 P2.22@2394,3950
SWO: P1.6 U1.133 | length 1503.5
  Top Layer w10: P1.6@766,3450 766,3355 1156,2965 1261,2965 1286,2940 v1(1286,2815) ; v1(1286,2630) 1391.63,2524.37 U1.133@1648.83,2524.37
  Bottom Layer w10: v1(1286,2630) v1(1286,2815)
SX_GPIO0_U_LoRa_downlink: LoRa_downlink.25
SX_GPIO0_U_LoRa_uplink: LoRa_uplink.25
SX_GPIO1_U_LoRa_downlink: LoRa_downlink.26
SX_GPIO1_U_LoRa_uplink: LoRa_uplink.26
SX_GPIO2_U_LoRa_downlink: LoRa_downlink.27
SX_GPIO2_U_LoRa_uplink: LoRa_uplink.27
SX_GPIO3_U_LoRa_downlink: LoRa_downlink.28
SX_GPIO3_U_LoRa_uplink: LoRa_uplink.28
SX_GPIO4_U_LoRa_downlink: LoRa_downlink.29
SX_GPIO4_U_LoRa_uplink: LoRa_uplink.29
SX_GPIO5_U_LoRa_downlink: LoRa_downlink.30
SX_GPIO5_U_LoRa_uplink: LoRa_uplink.30
SX_GPIO6_U_LoRa_downlink: LoRa_downlink.31
SX_GPIO6_U_LoRa_uplink: LoRa_uplink.31
SX_GPIO7_U_LoRa_downlink: LoRa_downlink.33
SX_GPIO7_U_LoRa_uplink: LoRa_uplink.33
TCK: P1.5 U1.109 | length 1129.7
  Top Layer w10: P1.5@766,3550 1072,3550 1420,3202 v1(1421,3202) ; v1(1531,3094) 1531,3063.79 1597.63,2997.16 1648.49,2997.16 U1.109@1648.83,2996.81
  Bottom Layer w10: v1(1421,3202) 1529,3094 v1(1531,3094)
TMS: P1.4 U1.105 | length 1350
  Top Layer w10: P1.4@766,3650 P1.4@768.5,3647.5 ; v1(1528.68,3479.13) 1780.38,3227.43 1780.38,3069.99 U1.105@1780.72,3069.65
  Bottom Layer w10: P1.4@766,3648 1358,3648 1526.87,3479.13 v1(1528.68,3479.13)
TX_IMU: P5.1 U1.36 | length 617.9
  Top Layer w10: U1.36@2410.65,2235 2534,2235 2854,1915 P5.1@2896,1915
UART2TTL_RX: P2.16 U1.102 | length 985.7
  Top Layer w10: U1.102@1839.78,3069.65 1839.78,3203.95 1900,3264.17 1900,3639 2033.53,3772.53 2033.53,3889.53 P2.16@2094,3950
UART2TTL_TX: P2.18 U1.101 | length 1051.7
  Top Layer w10: U1.101@1859.46,3069.65 1859.46,3202.42 1915,3257.96 1915,3632.79 2048.53,3766.31 2048.53,3860.43 2088.62,3900.52 2133.64,3900.52 2183.12,3950 P2.18@2194,3950
VDD_ANA: LoRa_downlink.2 LoRa_downlink.22 LoRa_uplink.2 LoRa_uplink.22 R18.2 R19.2 | length 971
  Top Layer w16: LoRa_uplink.2@3021,1640 LoRa_uplink.2@3022,1639
  Top Layer w25: LoRa_downlink.22@471,1939.26 LoRa_downlink.22@471,1940 523.97,1887.03 R18.2@523.97,1532.97 ; LoRa_downlink.2@472,1641 521.47,1641 ; LoRa_uplink.22@3021,1940 3021,1939.26 3068.03,1892.24 3068.03,1639 ; LoRa_uplink.2@3022,1639 3068.03,1639 ; R19.2@3074,1519 R19.2@3071.01,1521.99 3068.03,1524.97 3068.03,1639
  Top Layer w30: LoRa_downlink.2@471,1640 LoRa_downlink.2@472,1641
VDD_FEM: LoRa_downlink.34 LoRa_uplink.34
VDD_RFS: 
VIN_DCDC: C51.1 L1.2 PS1.2
pads on no net: LoRa_downlink.15 LoRa_uplink.15 P3.1 P3.2 P3.3 P3.4 P3.5 P3.6 P4.1 P4.2 P4.3 P4.8 P5.5 P5.6 P5.7 P5.8 P6.3 P6.4 P6.5 P6.6 P6.8 P6.9 P6.10 PS1.3 PS1.5 PS1.8 U1.2 U1.7 U1.9 U1.10 U1.11 U1.12 U1.13 U1.14 U1.15 U1.18 U1.19 U1.20 U1.21 U1.22 U1.24 U1.26 U1.27 U1.28 U1.29 U1.47 U1.48 U1.49 U1.50 U1.53 U1.54 U1.55 U1.56 U1.57 U1.58 U1.59 U1.60 U1.63 U1.64 U1.65 U1.75 U1.76 U1.77 U1.78 U1.79 U1.80 U1.81 U1.82 U1.85 U1.86 U1.91 U1.92 U1.93 U1.98 U1.99 U1.100 U1.114 U1.115 U1.116 U1.117 U1.118 U1.119 U1.122 U1.123 U1.127 U1.128 U1.129 U1.132 U1.134 U1.135 U1.136 U1.137 U1.139 U2.5 U3.5 U8.B2 U8.C2 U9.B2 U9.C2 U10.B2 U10.C2 Y2.1
copper on no net: | length 13.4
  Top Layer w10: 2191.78,-1375 2201.28,-1384.5

## Polygon pours and split planes (outlines as drawn)
GND on Top Layer "GND_L01_P056" (solid, pour order 56): 121,4077 4256,4077 4256,139.99 121,139.99
5V_VCC on Top Layer "5V_VCC_L01_P023" (solid, pour order 23): 2616,591 2521,591 2519,589 2493,853 680,853 256,1277 256,2338 323,2405 323,2587 717,2981 1044,2981 1072,2953 1232,2953 1232,2879 1075,2879 1037,2841 772,2841 478,2547 478,2354 387,2263 387,1410 812,985 2231,985 2231,1131 2231,1140 2309,1140 2336,1113 2336,1038 2442,1038 2877,1398 3738,1398 4004,1609 4004,1767 3592,2240 3592,2473 3592,2498 3631,2498 3696,2292 4111,1836 4111,1520 3835.4,1244.4 2955,1221 2693,1005 2657,840
FC_VCC on Top Layer "FC_VCC_L01_P007" (solid, pour order 7): 3771,911.04 3771,770 3673.75,770 3564.5,675 3451,675 3451,780 3456,785 3551,785 3679.87,913.87
FC_GND on Top Layer "FC_GND_L01_P008" (solid, pour order 8): 3116,515 4081,515 4081,633 3163,633 3095,701 3009,701 3009,592
VIN_DCDC on Top Layer "VIN_DCDC_L01_P009" (solid, pour order 9): 3311,700 3311,790 3016,790 3016,905 2962,905 2921,705 2921,605 2934,592 3010,592 3010,700 3256,700
VIN_DCDC on Top Layer "VIN_DCDC_L01_P010" (solid, pour order 10): 2962,905 2962,982 3016,982 3016,905
FC_GND on Top Layer "FC_GND_L01_P012" (solid, pour order 12): 4026,830 4146,830 4151,825 4151,535 4151,515 4026,515
7V4_VCC on Top Layer "7V4_VCC_L01_P013" (solid, pour order 13): 4146,1240 4041,1240 3921,1195 3833,1163 3833,1076 3895,1076 4146,1128
FC_VCC on Top Layer "FC_VCC_L01_P014" (solid, pour order 14): 4146,930 4146,1025 4141,1030 4021,1045 3836,1045 3836,985 3886,935
FC_VCC on Top Layer "FC_VCC_L01_P015" (solid, pour order 15): 3791,910 3836,955 3836,1000 3861,1000 3911,950 3911,870 3811,770 3716,770 3716,910
25V9_VCC on Top Layer "25V9_VCC_L01_P017" (solid, pour order 17): 4144,3649 4039,3649 3929,3615 3794,3579.32 3794,3508 4144,3540
IN-_PM3 on Top Layer "IN-_PM3_L01_P018" (solid, pour order 18): 3794,3473 3789,3478 4143,3456 4144,3349 4143,3348 4055,3348 4054,3347 3952,3376 3794,3416.24
Motor_GND on Top Layer "MOTOR_GND_L01_P019" (solid, pour order 19): 4030,3239 4143,3239 4144,3238 4144,2946 4036,2946 4033,2949
PA_GND on Top Layer "PA_GND_L01_P020" (solid, pour order 20): 4031,2403 4144,2403 4150,2409 4150,2105 4028,2105 4027,2106
14V8_VCC on Top Layer "14V8_VCC_L01_P021" (solid, pour order 21): 4149,2800 4037,2800 3937,2762 3796,2710.81 3800,2654 4132,2678
IN-_PM2 on Top Layer "IN-_PM2_L01_P022" (solid, pour order 22): 3795,2624 4148,2601 4148,2507 4147,2506 4053,2506 4052,2505 3963,2528 3795,2564
5V_VCC on Top Layer "5V_VCC_L01_P024" (solid, pour order 24): 2644.78,968 2937,968 2937,928 2644.78,928
5V_VCC on Top Layer "5V_VCC_L01_P025" (solid, pour order 25): 2900,933.56 2900,1009 2937,1009 2937,932.47
5V_VCC on Top Layer "5V_VCC_L01_P026" (solid, remove dead copper, pour order 26): 3251.5,1282.5 3347,1004 3530,1004 3530,1036 3390,1036 3368,1110 3605,1105 3605,1134 3365.26,1134 3349.13,1275.12
5V_VCC on Top Layer "5V_VCC_L01_P027" (solid, pour order 27): 3530,1036 3562.76,1000 3713,1000 3713,967 3624.68,967 3614.68,967 3559.68,967 3505,1011
5V_VCC on Top Layer "5V_VCC_L01_P029" (solid, pour order 29): 3631,2498 3621.1,2600 3592,2600 3592,2484
3V3_VCC on Top Layer "3V3_VCC_L01_P031" (solid, pour order 31): 2148.15,1269 2120,1269 2120,1301 2124,1305 2142.48,1305 2142.48,1422.65 1501,1427 621,1488 621,1562 1501,1562 1501,1867 1519,1885 1586,1885 1586,1525 1597,1514 1667,1514 1667,1818 2030,2151 2079,2151 2079,2121 2074,2116 2034,2116 2011.5,2072.5 1745,1778 1745,1477 2163,1477 2220,1420 2220,1269
3V3_VCC on Top Layer "3V3_VCC_L01_P033" (solid, pour order 33): 1501,2054 1501,2168 1524,2191 1524,2224 1555,2224 1580,2199 1582,2060
3V3_VCC on Top Layer "3V3_VCC_L01_P035" (solid, pour order 35): 2156.67,1477 2340.5,1477 2446,1561 2972,1561 2972,1487 2971,1486 2512,1486 2358,1332 2158.39,1332
3V3_VCC on Top Layer "3V3_VCC_L01_P037" (solid, pour order 37): 1354,2644 1413,2644 1436,2621 1566,2621 1570,2546 1544,2546 1541,2549 1541,2594 1352,2594
3V3_VCC on Top Layer "3V3_VCC_L01_P039" (solid, pour order 39): 1368,2848 1430,2848 1460,2818 1567,2818 1571,2742 1541,2742 1541,2792 1368,2792 1367,2793
3V3_VCC on Top Layer "3V3_VCC_L01_P040" (solid, pour order 40): 1430,2848 1427,2851 1427,2925 1302,3050 1162,3050 1156,3044 1156,2999 1178,2977 1296,2977 1368,2905 1368,2848
3V3_VCC on Top Layer "3V3_VCC_L01_P043" (solid, pour order 43): 1633,3013 1613,3013 1595,3031 1595,3047 1633,3081 1689,3081 1689,3052 1654,3052 1653,3051
3V3_VCC on Top Layer "3V3_VCC_L01_P047" (solid, pour order 47): 2446,1546.83 2468,2202 2528,2202 2554,1546.83
5V_VCC on Top Layer "5V_VCC_L01_P049" (solid, pour order 49): 1827,3331 1785,3331 1779,3325 1779,3285 1832,3285 1832,3322.87
5V_VCC on Top Layer "5V_VCC_L01_P050" (solid, pour order 50): 2569,3333 2608,3333 2617,3324 2617,3286 2562,3286 2562,3319
5V_VCC on Top Layer "5V_VCC_L01_P051" (solid, pour order 51): 3635,2336 3214.33,2756.67 3204.38,2886 3098,2886 3098,2734 3592,2240
3V3_VCC on Top Layer "3V3_VCC_L01_P059" (solid, pour order 59): 1667,1795.71 1667,2017 1804,2158 1837.02,2158 1836.71,2127 1801,2127 1729,2033 1737.95,1826.12
GND on Bottom Layer "GND_L02_P055" (solid, pour order 55): 121,4077 4256,4077 4256,140 121,140
5V_VCC on Bottom Layer "5V_VCC_L02_P061" (solid, pour order 61): 3182,3345 3569,3345 3596,3374 3596,3578 3618.94,3578 3624,3337 3568,3281 3182,3281
5V_VCC on Bottom Layer "5V_VCC_L02_P060" (solid, pour order 60): 3209,3194 3176.25,3843.75 3039,3881 2764,3881 2764,3820 2765,3819 2766,3820 3082,3784 3100,3206.11
3V3_VCC on Bottom Layer "3V3_VCC_L02_P057" (solid, pour order 57): 1371.54,2901.46 1297,2976 1297,3420 1300,3423 1365,3423 1372.4,3415.6 1372.4,2978
5V_VCC on Bottom Layer "5V_VCC_L02_P053" (solid, pour order 53): 2562,3226.81 2430,3299 1839,3299 1826,3286 1780,3286 1780,3326 1785,3331 2446.81,3331 2623,3258.28 2623,3225
5V_VCC on Bottom Layer "5V_VCC_L02_P052" (solid, pour order 52): 3205,2824 3209,3197.75 3177,3238 2630.45,3238 2613.62,3333 2562,3333 2562,3226.81 2674,3120 3099,3120 3099,2824
3V3_VCC on Bottom Layer "3V3_VCC_L02_P044" (solid, pour order 44): 2557,3083 2602,3083 2602,2243 2569,2243 2557,2265
3V3_VCC on Bottom Layer "3V3_VCC_L02_P048" (solid, pour order 48): 2469,2146 2520,2146 2602,2228 2602,2259 2589,2272 2564,2272 2495,2203 2468,2203
3V3_VCC on Bottom Layer "3V3_VCC_L02_P042" (solid, pour order 42): 1372.4,2978 1486.15,2978 1609,3057 1642,3057 1642,3023.9 1523,2917 1368.04,2917
3V3_VCC on Bottom Layer "3V3_VCC_L02_P036" (solid, pour order 36): 1581,2059 1446,2059 1266,2239 1266,2550 1352,2636 1372.6,2978 1440,2978 1429,2806 1401,2762 1401,2562 1331,2511 1331,2282 1412,2186 1475,2123 1581,2123
3V3_VCC on Bottom Layer "3V3_VCC_L02_P032" (solid, pour order 32): 1586.65,1809 1502,1809 1502,2106 1519,2123 1581,2123

## Silkscreen, mask and mechanical layers (free items; w line width, h text height)
Top Overlay:
  region: 653.5,357 653.5,383 580.5,403 556.5,403 441.5,365 556.5,335 580.5,335
  region: 1823,371 1769,386 1692,386 1667,395 1543,395 1527,411 1520,411 1516.44,395 813,395 758,435 720,435 699,395 692,395 676,385 660,385 660,356 676,356 692,347 699,347 720,308 758,308 813,347 1516,347 1519,332 1525,332 1543,347 1667,347 1692,356 1769,356
  text "Asfaloth-L2  / Flight Computer ver1.0" at 486,482 h80
Top Solder:
  rectangle: 1884,1132 1963,1259
Bottom Solder:
  rectangle: 1853,1096 1965,1302
Mechanical 1:
  lines w10: 4254.86,140 121,140 121,4077.01 4256,4077.01 4256,140
Drill Drawing:
  text ".Legend" at 4436,2062.99 h60

## Dimensions
121,140 to 121,4077.01 on Mechanical 1
121,140 to 4254.86,140 on Mechanical 1

## Text inside footprints (layer, text, board x,y; h text height)
LoRa_downlink: Bottom Overlay "22" at 396.2,1925.04 h31.5; Bottom Overlay "21" at 396.2,2025.43 h31.5; Bottom Overlay "1" at 392.26,1724.25 h31.5; Bottom Overlay "2" at 396.2,1625.83 h31.5
LoRa_uplink: Bottom Overlay "22" at 2946.2,1925.04 h31.5; Bottom Overlay "21" at 2946.2,2025.43 h31.5; Bottom Overlay "1" at 2942.26,1724.25 h31.5; Bottom Overlay "2" at 2946.2,1625.83 h31.5
P2: Top Overlay "2" at 1294,3930 h50; Top Overlay "1" at 1294,3830 h50; Top Overlay "31" at 2954,3830 h50; Top Overlay "32" at 2954,3930 h50